# Altium PCB PCB_V1.PcbDoc (part 2 of 3)
Units mil, origin at the board's own origin, x right, y up, seen from the top; angles counter-clockwise.
Board outline 2382 x 2362.37 mil, 4 copper layers (L1, L2, L3, L4), stack 59.054 mil thick; 159 components, 117 nets, 497 pads, 313 vias.
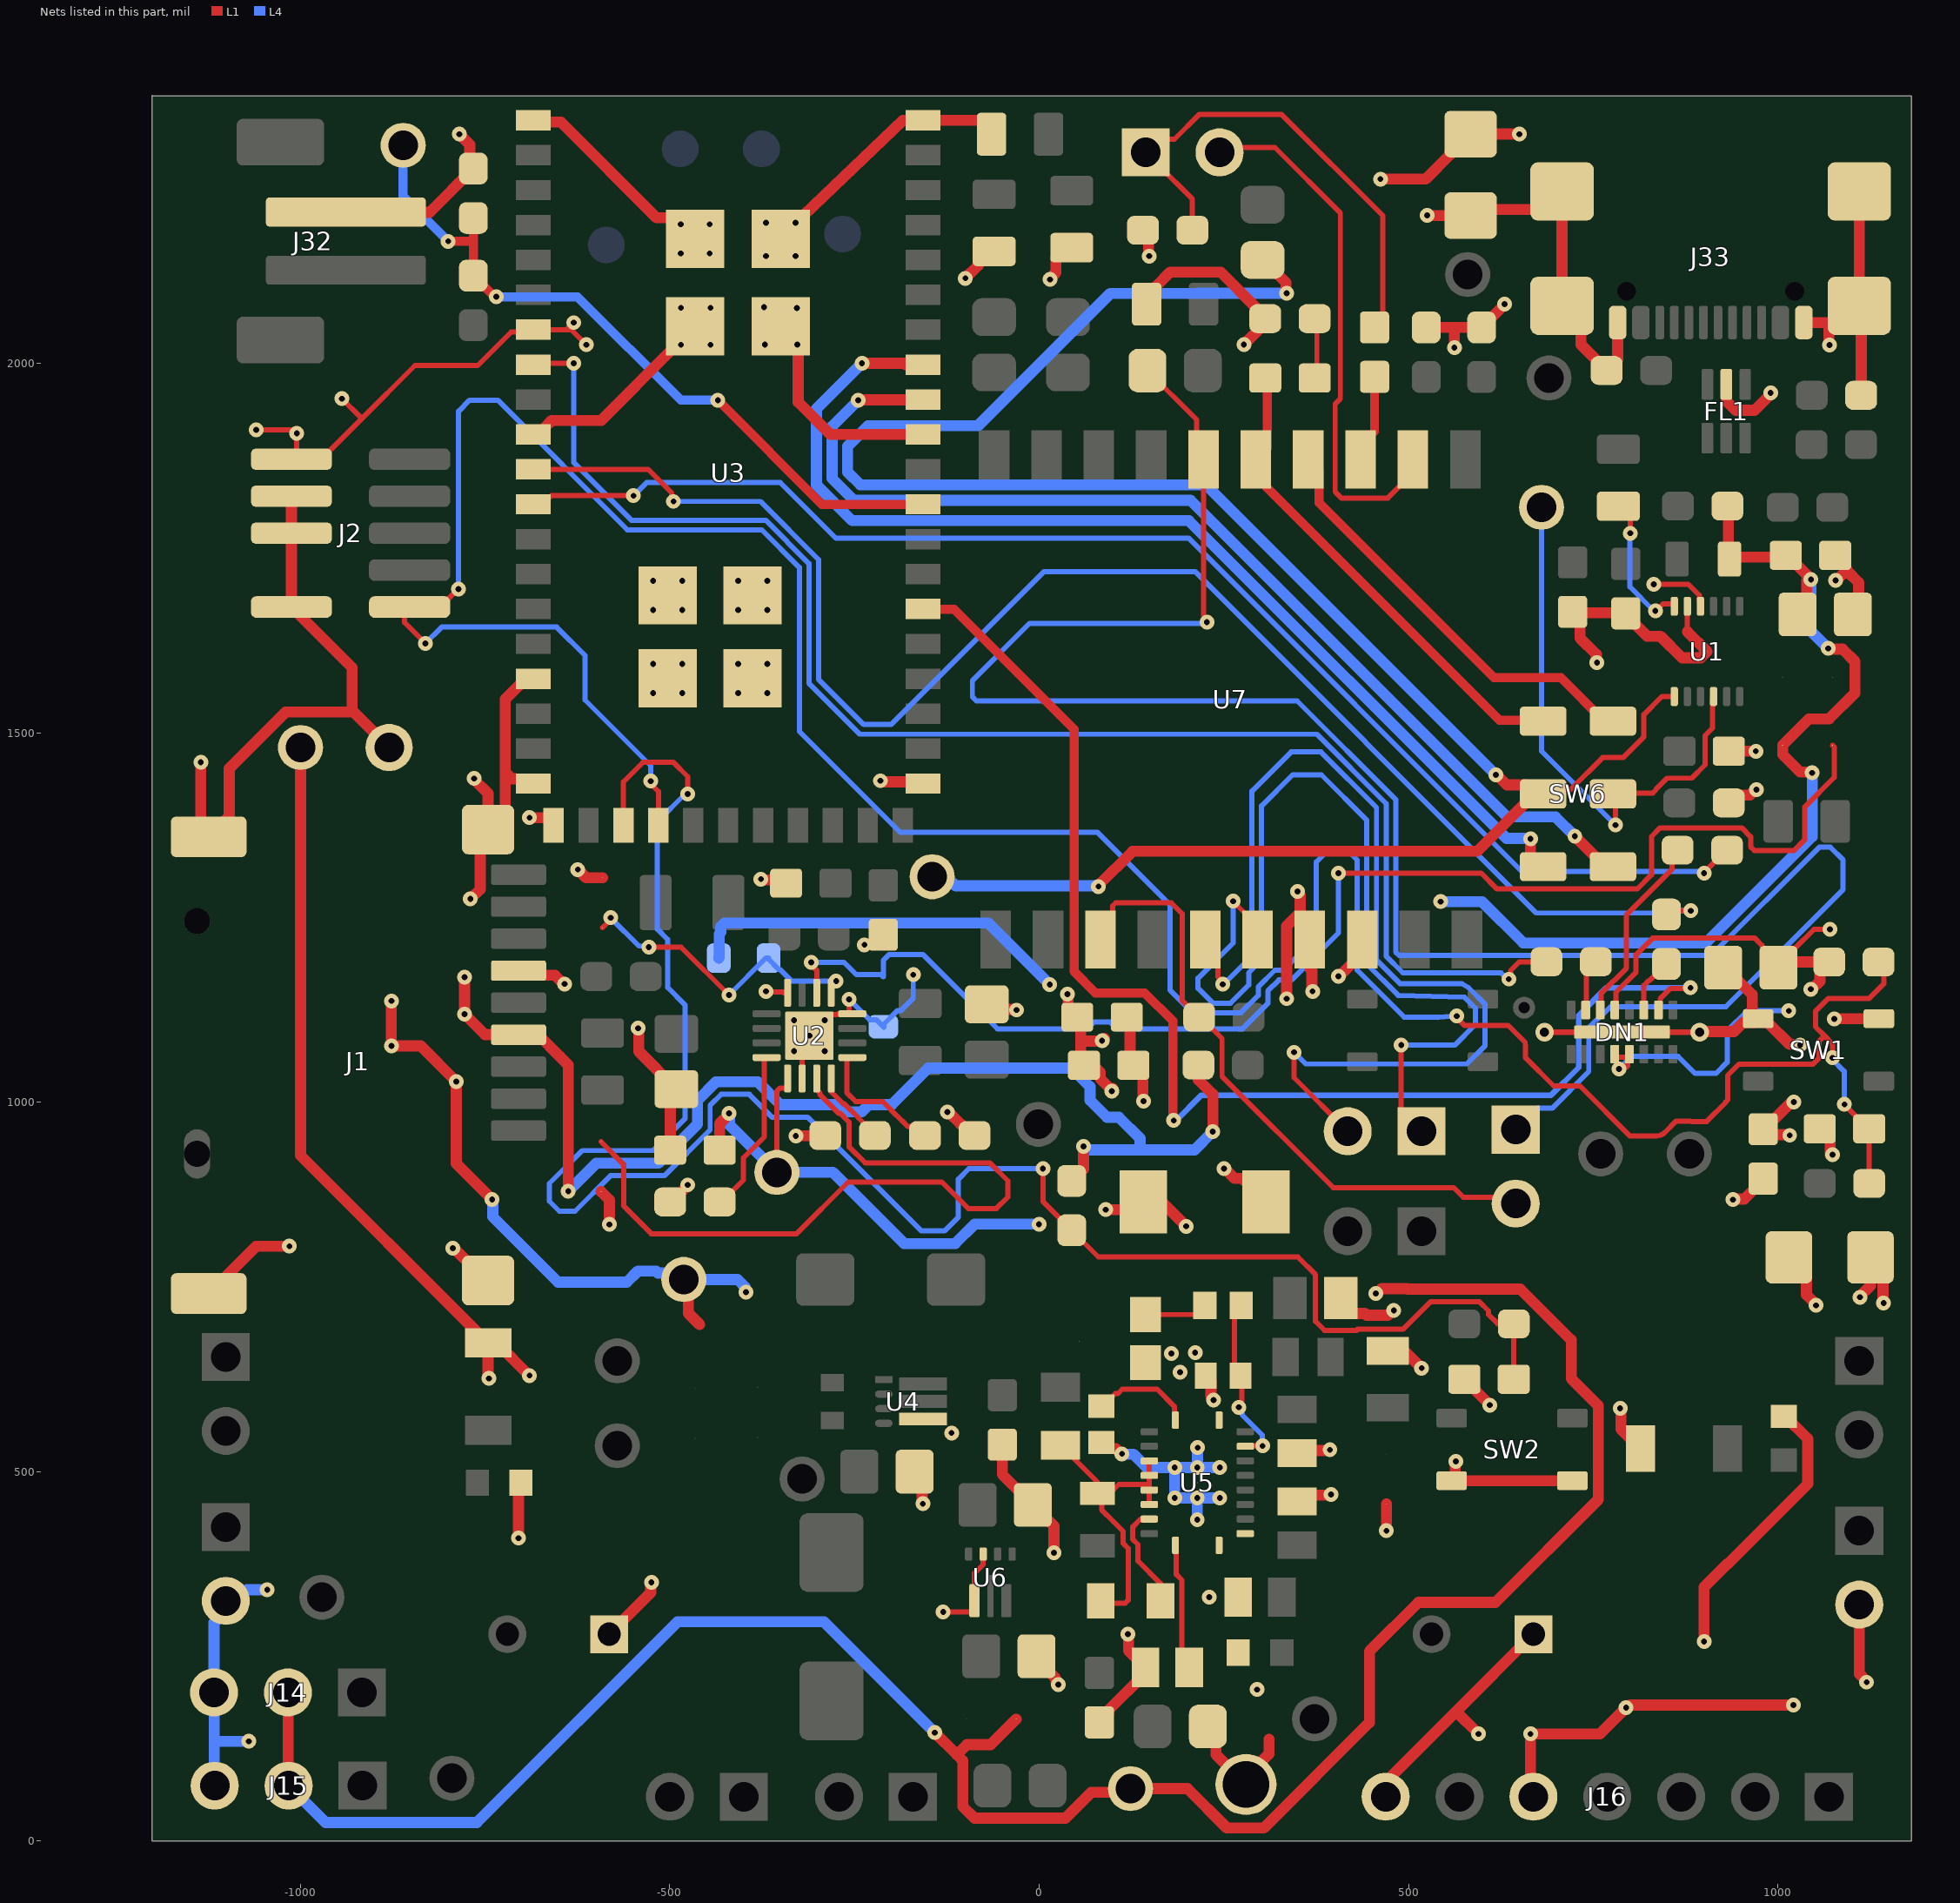
[diagram p4: the nets of this part, all layers, seen from the top]

## Part data (continued)
FL1: library part CMP-00571-2, "Terminator, 2-Line, PDSO6; RC (Pi) EMI Filter 2nd Order Low Pass 2 Channel R = 22Ohms, C = 47pF 6-TSSOP, SC-88, SOT-363, USB 1.1", Case/Package=TSSOP, Max Operating Temperature=70°C, Min Operating Temperature=-40°C, Nominal Supply Voltage=3.3V, Package Body Material=Plastic, Package Equivalence Code=TSSOP6,.08, Package Shape=Rectangular, Package Style="SMALL OUTLINE, THIN PROFILE, SHRINK PITCHMeter", Peak Reflow Temperature (Cel)=260°C, Temperature Grade=OTHER, Channels=1, Differential Output=Yes, Height - Seated (Max)=1.1mm, Interface IC Type="OTHER TERMINATOR", JESD-30 Code=R-PDSO-G6, JESD-609 Code=e3, Length=2mm, Moisture Sensitivity Level=1, Number of Signal Positions=2, Pins=6, Power Supplies=3.3V, Qualification Status="Not Qualified", Reach SVHC Compliant=Yes, RoHS Compliant=Yes, Surface Mount=Yes, Terminal Finish=Tin, Terminal Form="Gull Wing", Terminal Pitch=0.65mm, Terminal Position=DUAL, Width=1.25mm
J1: library part CMP-00419-6, "WR-CRD Micro SD Card Connector Push & Push", Contact Resistance=100mOhm, Operating Temperature="-40 to +85degC", Rated Current=0.5A, Withstanding Voltage=500VAC, Working Voltage=30VAC, ComponentLink1Description=Manufacturer, ComponentLink1URL=http://www.we-online.de, ComponentLink2Description=Datasheet, ComponentLink2URL=https://katalog.we-online.com/em/datasheet/693071020811.pdf, Design Item ID=693071020811, Gender=Socket, Memory Card Type="Micro SD", Mounting Technology=SMT, Number of Contacts=8, Packaging="Tape and Reel", Part Number=693071020811, Pin Number=8, Published Date="November 2019", Publisher="Wurth Elektronik", Source=WR-CRD.SchLib, Type="Push & Push"
J2: library part CMP-002-000013-2, "10 Pin Shrouded Header, 0.050\", Key Pin 7", Manufacturer=Samtech, Manufacturer P/N=Various, ComponentLink1Description="Pinout Reference", ComponentLink1URL=https://developer.arm.com/documentation/ka001776/1-0/?lang=en, ComponentLink2Description="Datasheet for Connector", ComponentLink2URL=http://suddendocs.samtec.com/catalog_english/ftsh_smt.pdf, Contact Finish=Gold, Description in Visual="10 Pin Shrouded Header, 0.050\", Key Pin 7", Gender=Male, Number of Contacts=10, Number of Rows=2, Orientation=Vertical, P/N="ARM Cortex Debug", Pitch="0.050\""
J4 J5 J6 J7 J8 J9 J10 J11 J12 J13: library part CMP-000021-1, "Header, 2-Pin, 0.1in Pitch, Male"
J14 J15: library part CMP-000023-1, "Header, 3-Pin, 0.1in Pitch, Male"
J16: library part CMP-00373-1, "Header, 7-Pin, 0.1in Pitch, Male", Contact Resistance=20mR, Dielectric Withstanding Voltage (AC)=500V, Insulation Color=Black, Insulation Resistance=1GR, Max Operating Temperature=125°C, Min Operating Temperature=-40°C, Rated Current (Signal)=3A, Body Breadth=0.1inch, Body Depth=0.1inch, Body Length=0.7inch, Body/Shell Style=PLUG, Connector Type="BOARD CONNECTOR", Contact Finish - Mating=GOLD, Contact Finish - Termination="Gold (Au) - with Nickel (Ni) barrier", Contact Gender=Male, Contact Material="Copper Alloy", Contact Pattern=RECTANGULAR, Contact Style="SQ PIN-SKT", Insulation Material=Polybutylene, JESD-609 Code=e4, Mating Contact Pitch=0.1inch, Mounting Option 1=LOCKING, Mounting Style=STRAIGHT, Mounting Technology=Board, Number Of Connectors=1, Number of Contacts=7, Number of Rows Loaded=1, PCB Contact Pattern=RECTANGULAR, Reach SVHC Compliant=Yes, Reference Standard=UL, Reliability=COMMERCIAL, RoHS Compliant=Yes, Terminal Length=0.118inch, Terminal Pitch=2.54mm, Termination=Solder
J32: library part CMP-00418-1, "Connector Header, PH Series, 2 Position, 2.00mm, 100V, Surface Mount, Solder, Pick and Place, Natural."
J33: library part CMP-00451-3, "USB Connector, 16 Contact(s), Male, Right Angle, Surface Mount Terminal, Locking, Receptacle USB-C (USB TYPE-C) USB 2.0 Receptacle Connector 24 (16+8 Dummy) Position Surface Mount, Right Angle"
JP1 JP2 JP4 JP5 JP9 JP10 JP11 JP12 JP13 JP14: library part CMP-00422-5, "0O link, SMD, 0603, Solder Bridge Option", Manufacturer=Generic, Manufacturer P/N=Various, Component Type="Net Tie", Description in Visual="0O link, Solder Bridge/SMD, Open", Design Item ID="0603 link", P/N="0603 link", Pin Count=2, Source="Shunts and Jumpers.SchLib"
JP3 JP6: library part CMP-00423-2, "0O link, Solder Bridge/SMD, Open", Component Type="Standard (No BOM)", Description in Visual="0O link, Solder Bridge/SMD, Open", Design Item ID="0603 link (Open)", P/N="0603 link (Open)", Pin Count=2, Source="Shunts and Jumpers.SchLib"
L1: library part CMP-002-000030-2, "General Purpose Inductor, 0.47uH, 20%, 1 Element, Powdered  Iron-Core, SMD, 2220", Current (Max)=9.2A, Current (Saturation)=21.5A, Inductor Type="GENERAL PURPOSE INDUCTOR", JESD-609 Code=e2, Manufacturer Series=744373360047, Reach SVHC Compliant=Yes, RoHS Compliant=Yes, Terminal Finish=Copper
L2: library part CMP-06042-000167-1, "FIXED IND 1UH 115MA 2.86 OHM SMD", Case Code (Imperial)=0805, Case Code (Metric)=2012, Current Rating=115mA, DC Resistance (DCR)=2.86R, Max Operating Temperature=85°C, Min Operating Temperature=-40°C, Package Quantity=3000, Resistor Type=Wirewound, Self Resonant Frequency=450MHz, Test Frequency=10MHz, Tolerance=5%, Case/Package=0805, Core Material=Ferrite, DC Current=115mA, Depth=1.4mm, Height=0.9mm, Height - Seated (Max)=0.039inch, Inductance=1uH, Lead Free="Lead Free", Length=2mm, Max DC Current=115mA, Military Standard=Not, Mount="Surface Mount", Packaging="Tape and Reel", Q Factor=35, Radiation Hardening=No, Shielding=Unshielded, Termination=SMD/SMT, Weight=0.000282oz, Width=1.5mm
L3: library part CMP-002-000018-2, "General Purpose Inductor, 1uH, 20%, 1 Element, SMD, 2827", Case/Size Code=2827, DC Resistance (DCR)=4.6mR, Inductance-Nom (L)=1uH, Inductor Application="HIGH CURRENT INDUCTOR", Inductor Type="GENERAL PURPOSE INDUCTOR", Max Current Rating=15A, Max Operating Temperature=150°C, Min Operating Temperature=-40°C, Package Height=3.8mm, Package Length=7mm, Package Style=SMTMeter, Package Width=6.9mm, Self Resonant Frequency=85MHz, Test Frequency=100kHz, Tolerance=20%, Channels=1, Construction="Magnetically Shielded", Packaging="Tape and Reel", Pins=2, Reach SVHC Compliant=Yes, RoHS Compliant=Yes, Series=744311100, Shape/Size Description="RECTANGULAR PACKAGE", Shielding=Unshielded, Surface Mount=Yes, Terminal Finish=Copper, Terminal Placement="Dual Ended", Termination=Wraparound
R1 R3 R4 R6 R7: library part CMP-005-002503-3, "Resistor Surface Mount, 1K Ohms, 0603 Footprint, 1% Tolerance 0.1W", JLCPCB Part #=C21190, Manufacturer=Various, PCB Package=0603, Power Rating=0.1W, Tolerance=1%, Description in Visual="Res SMT 1K 0603  1%  0.1W", Manufacturer P/N="RES 0603 1K 1%", Mount=SMT
R2 R5: library part CMP-005-001984-2, "Resistor Surface Mount, 1.13K Ohms, 0603 Footprint, 1% Tolerance 0.1W", Manufacturer=Various, PCB Package=0603, Power Rating=0.1W, Tolerance=1%, Description in Visual="Res SMT 1.13K 0603  1%  0.1W", Manufacturer P/N="RES 0603 1.13K 1%", Mount=SMT
R8 R9 R39: library part CMP-005-002125-2, "Resistor Surface Mount, 100 Ohms, 0603 Footprint, 1% Tolerance 0.1W", Manufacturer=Various, Manufacturer P/N="RES 0603 100R 1%", PCB Package=0603, Power Rating=0.1W, Tolerance=1%, Description in Visual="Res SMT 100 0603  1%  0.1W", Mount=SMT
R10 R11: library part CMP-005-002156-3, "Resistor Surface Mount, 10K Ohms, 0603 Footprint, 1% Tolerance 0.1W", JLCPCB Part #=C25804, Manufacturer=Various, PCB Package=0603, Power Rating=0.1W, Tolerance=1%, Description in Visual="Res SMT 10K 0603  1%  0.1W", Manufacturer P/N="RES 0603 10K 1%", Mount=SMT
R12: library part CMP-005-002260-2, "Resistor Surface Mount, 12K Ohms, 0603 Footprint, 5% Tolerance 0.1W", Manufacturer=Various, PCB Package=0603, Power Rating=0.1W, Tolerance=5%, Description in Visual="Res SMT 12K 0603  5%  0.1W", Manufacturer P/N="RES 0603 12K 5%", Mount=SMT
R13 R15: library part CMP-005-003296-4, "Resistor Surface Mount, 5.1K Ohms, 0603 Footprint, 1% Tolerance 0.1W", Manufacturer=Various, PCB Package=0603, Power Rating=0.1W, Tolerance=1%, Description in Visual="Res SMT 5.1K 0603  1%  0.1W", Manufacturer P/N="RES 0603 5.1K 1%", Mount=SMT
R14 R34: library part CMP-005-002155-2, "Resistor Surface Mount, 10K Ohms, 0603 Footprint, 0.1% Tolerance 0.1W", Manufacturer=Various, PCB Package=0603, Power Rating=0.1W, Tolerance=0.1%, Description in Visual="Res SMT 10K 0603  0.1%  0.1W", Manufacturer P/N="RES 0603 10K 0.1%", Mount=SMT
R16 R17 R19 R20 R24 R35: library part CMP-005-001964-4, "Resistor Surface Mount, 0 Ohms, 0603 Footprint, 5% Tolerance 0.1W", JLCPCB Part #=C21189, Manufacturer=Various, Manufacturer P/N="RES 0603 0R 5%", PCB Package=0603, Power Rating=0.1W, Tolerance=5%, Description in Visual="Res SMT 0 0603  5%  0.1W", Mount=SMT
R21 R23: library part CMP-005-003137-2, "Resistor Surface Mount, 4.7K Ohms, 0603 Footprint, 1% Tolerance 0.1W", Manufacturer=Various, PCB Package=0603, Power Rating=0.1W, Tolerance=1%, Description in Visual="Res SMT 4.7K 0603  1%  0.1W", Manufacturer P/N="RES 0603 4.7K 1%", Mount=SMT
R22 R36 R37 R38: library part CMP-005-005144-2, "Resistor Surface Mount, 470 Ohms, 0805 Footprint, 5% Tolerance 0.125W", Manufacturer=Various, Manufacturer P/N="RES 0805 470R 5%", PCB Package=0805, Power Rating=0.125W, Tolerance=5%, Description in Visual="Res SMT 470 0805  5%  0.125W", Mount=SMT
R25: library part CMP-03211-008573-2, "Surface Mount Resistors, Precision Resistor, 2 Terminations, Size Code 0805, Cut Tape Length, .1%, Thin Film, 10K 0.1% 10PPM", Case Code (Imperial)=0805, Case Code (Metric)=2012, Max Operating Temperature=155°C, Min Operating Temperature=-55°C, Number of Resistors=1, Package Quantity=1000, Power Rating=125mW, Resistance=267kR, Temperature Coefficient=15ppm/°C, Tolerance=0.1%, Voltage Rating=150V, Case/Package=0805, ELV=Compliant, Height=0.55mm, Length=2mm, Mount="Surface Mount", Number of Terminations=2, Packaging="Tape and Reel", Termination=Solder, Weight=0.000194oz, Width=1.25mm
R26: library part CMP-2001-04290-2, "RES Thick Film, 127kΩ, 1%, 0.125W, 100ppm/°C, 0805", Case Code (Imperial)=0805, Case Code (Metric)=2012, Max Operating Temperature=155°C, Max Power Dissipation=125mW, Min Operating Temperature=-55°C, Package Quantity=10, Resistance=127kR, Temperature Coefficient=100ppm/°C, Tolerance=1%, Voltage Rating=150V, Case/Package=0805, Composition="Thick Film", Contact Plating=Tin, Depth=1.25mm, Features="Automotive AEC-Q200", Height=0.02inch, Lead Free="Lead Free", Length=2mm, Military Standard=Not, Number of Pins=2, Number of Terminations=2, Packaging="Tape and Reel", Power Rating=125mW, Radiation Hardening=No, Voltage Rating (DC)=150V, Weight=0.000194oz, Width=1.25mm
R27: library part CMP-03211-004111-1, "CRGCQ0805 470KΩ 0.125W ±100ppm/°C 5% 150V", Ambient Temperature Range High=+70°C, Manufacturer="TE Connectivity", Manufacturer Part Number=CRGCQ0805J470K, Package=CRGCQ0805, Power Rating=0.125W, Resistance=470KΩ, Temperature="-55°C to +155°C", Temperature Coefficient=±100ppm/°C, Temperature Range High=+155°C, Temperature Range Low=-55°C, Tolerance=0.05, Voltage Rating=150V, Automotive=Yes, Automotive Grade="Grade 1294", Category=Res, ComponentLink2Description=Datasheet, ComponentLink2URL=https://www.te.com/commerce/DocumentDelivery/DDEController?Action=showdoc&DocId=Data+Sheet%7F1773204-3%7F1%7Fpdf%7FEnglish%7FENG_DS_1773204-3_1.pdf%7F4-2176341-1303, Composition="Thick Film", Device Class L1="Passive Components", Device Class L2=Resistors, Device Class L3="Chip SMD Resistors", Height=0.65mm, Ipc Land Pattern Name=RESC200125X55, Lead Free=Yes, Octopart=https://octopart.com/crgcq0805j470k-te+connectivity-91018228, RoHS=TRUE, Series=CRGCQ
R28: library part CMP-2000-03154-1, Manufacturer="Vishay Dale", Part Number=CRCW060328K7FKEA
R29: library part CMP-2001-04400-1, Manufacturer=Panasonic, Part Number=ERJ-6ENF1183V
R30: library part CMP-005-004027-2, "Resistor Surface Mount, 100K Ohms, 0805 Footprint, 1% Tolerance 0.125W", Manufacturer=Various, PCB Package=0805, Power Rating=0.125W, Tolerance=1%, Description in Visual="Res SMT 100K 0805  1%  0.125W", Manufacturer P/N="RES 0805 100K 1%", Mount=SMT
R31: library part CMP-005-005525-2, "Resistor Surface Mount, 732K Ohms, 0805 Footprint, 1% Tolerance 0.125W", Manufacturer=Various, PCB Package=0805, Power Rating=0.125W, Tolerance=1%, Description in Visual="Res SMT 732K 0805  1%  0.125W", Manufacturer P/N="RES 0805 732K 1%", Mount=SMT
R33: library part CMP-005-002832-2, "Resistor Surface Mount, 2K Ohms, 0603 Footprint, 0.1% Tolerance 0.1W", Manufacturer=Various, PCB Package=0603, Power Rating=0.1W, Tolerance=0.1%, Description in Visual="Res SMT 2K 0603  0.1%  0.1W", Manufacturer P/N="RES 0603 2K 0.1%", Mount=SMT
R40: library part CMP-1659-00056-1, "Chip Resistor, 1 MOhm, +/- 1%, 100 mW, -55 to 155 degC, 0603 (1608 Metric), RoHS, Tape and Reel", Capacitance="1 mF", Case\Package=Radial, Max Operating Temperature="85 degC", Min Operating Temperature="-40 degC", Package Quantity=200, Tolerance=20%, Voltage Rating="25 V", ComponentLink1Description="Manufacturer URL", ComponentLink1URL=http://www.yageo.com/, ComponentLink2Description=Datasheet, ComponentLink2URL=http://www.yageo.com/documents/recent/PYu-RC_Group_51_RoHS_L_04.pdf, DatasheetVersion="Rev. 4, 02/2016", Diameter="10 mm", Height="20 mm", Lead Pitch="5 mm", Length="20 mm", Mount="Through Hole", PackageDescription="2-Pin Surface Mount Device, Body 1.6 x 0.8 mm", PackageReference=0603, Packaging=Bulk, Radiation Hardening=No, REACH SVHC="No SVHC", RoHSCompliant=true, Voltage Rating (DC)="25 V", Width="0 inch"
SW1 SW2 SW7: library part CMP-00084-6, "Keypad Switch, 1 Switches, SPST, Momentary tactile button, 0.05A, 16VDC, 3.23N, Solder Terminal, Surface Mount-straight", Actuator Color=White, Contact Resistance=0.5mR, Dielectric Withstand Volts=250VACV, Insulation Resistance=100MR, Manufacturer Series=PTS810, Max Operating Temperature=85°C, Min Operating Temperature=-40°C, Actuator Length=0.028inch, Actuator Travel=0.1524mm, Actuator Type=Pushbutton, Circuit=SPST, Electrical Life=50000Cycles, JESD-609 Code=e4, Mounting Technology="Surface Mount", Reach SVHC Compliant=Yes, RoHS Compliant=Yes, Solderability=REFLOW, Switch Action=MOMENTARY, Switch Function=OFF-MOM, Switch Type=Keypad, Terminal Finish=Silver, Termination=Solder, Type=Tactile
SW6: library part CMP-00536-1, "Slide Switch, 2 Positions, DPDT, Latched, 0.3A, 6VDC, Solder Terminal, Surface Mount-straight", Circuit=DPDT, Switch Function=ON-ON, Type=Slide
TP1 TP2 TP3 TP4 TP5 TP6 TP7 TP9 TP10 TP11 TP12 TP13 TP14 TP15 TP16 TP17 TP18 TP19 TP20 TP21 TP22 TP23 TP24 TP25: library part CMP-00049-8, "Test Pad/Point (Testpoint, Testpad), for probing"
  TP1: NetName=SD_CD
  TP2: NetName=WI_TX
  TP3: NetName=WI_RX
  TP4: NetName=WI_RST
  TP5: NetName=WI_EN
  TP6: NetName=CLI_RX
  TP7: NetName=CLI_TX
  TP9: NetName=GND
  TP10: NetName=VUSB
  TP11: NetName=VBAT
  TP12: NetName=VSYS
  TP13: NetName=BOOST_VIN
  TP14: NetName=BOOST_6V
  TP15: NetName=BUCK_VIN
  TP16: NetName=3V3
  TP17: NetName=6V
  TP18: NetName=5V
  TP19: NetName=ADC_VIN
  TP20: NetName=PWM_M1
  TP21: NetName=PWM_M2
  TP22: NetName=FB_M2
  TP23: NetName=FB_M1
  TP24: NetName=SCL_AI
  TP25: NetName=SDA_AI
TP8: library part CMP-024-000010-2, "Circuit Board Hardware - PCB TEST POINT BLACK MULTIPURPOSE 5011 5281"
U1: library part CMP-00104-3, "USB Bridge, USB to UART USB 2.0 UART Interface 12-DFN (3x3)", Case/Package=HTSON, Max Operating Temperature=85°C, Max Supply Voltage=5.5V, Min Operating Temperature=-40°C, Min Supply Voltage=2.97V, Nominal Supply Voltage=5V, Package Body Material=Plastic, Package Shape=Square, Package Style="SMALL OUTLINE, HEAT SINK/SLUG, THIN PROFILEMeter", Peak Reflow Temperature (Cel)=260°C, Power Supplies=1.8/3.3,3.3/5V, Temperature Grade=INDUSTRIAL, Time @ Peak Reflow Temperature-Max (s)=40s, Length=3mm, Moisture Sensitivity Level=3, Pins=12, Qualification Status="Not Qualified", Reach SVHC Compliant=Yes, RoHS Compliant=Yes, Surface Mount=Yes, Technology=CMOS, Terminal Form="No Lead", Terminal Pitch=0.45mm, Terminal Position=DUAL, Width=3mm
U2: library part CMP-00080-5, "Power Supply Support Circuit, Adjustable, 1 Channel, 6.6, PQCC16", Case/Package=HVQCCN, Max Operating Temperature=85°C, Max Supply Voltage=26V, Min Operating Temperature=-40°C, Min Supply Voltage=4.35V, Nominal Supply Voltage=5V, Package Body Material=Plastic, Package Equivalence Code=LCC16,.12SQ,20, Package Shape=Square, Package Style="CHIP CARRIER, HEAT SINK/SLUG, VERY THIN PROFILEMeter", Peak Reflow Temperature (Cel)=260°C, Power Supplies=4.5/6.3V, Supply Current-Max (Isup)=1.5mA, Temperature Grade=INDUSTRIAL, Adjustable Threshold=Yes, Channels=1, Height - Seated (Max)=1mm, JESD-30 Code=S-PQCC-N16, JESD-609 Code=e4, Length=3mm, Moisture Sensitivity Level=2, Number Of Channels=1, Pins=16, Qualification Status="Not Qualified", Reach SVHC Compliant=Yes, RoHS Compliant=Yes, Surface Mount=Yes, Terminal Finish=Nickel, Terminal Form="No Lead", Terminal Pitch=0.5mm, Terminal Position=QUAD, Throw Configuration="POWER SUPPLY SUPPORT CIRCUIT", Width=3mm
U3: library part CMP-00071-11, "WiFi 802.11b/g/n Transceiver Module 2.412GHz ~ 2.484GHz Integrated, Trace Surface Mount, Integrated SAMD21 Cortex M0+", FCC ID=2ADHKSAMW25, MCU Chipset=ATSAMD21G18A
U4: library part CMP-04918-000186-1, "IC REG BUCK 3.3V 3A 7VSON-HR", Case/Package=VQFN, Max Input Voltage=6V, Max Operating Temperature=125°C, Max Output Current=3A, Min Input Voltage=2.5V, Min Operating Temperature=-40°C, Min Output Voltage=3.3V, Package Quantity=3000, Switching Frequency=2.4MHz, Efficiency=95%, Lead Free="Lead Free", Mount="Surface Mount", Number of Outputs=1, Number of Pins=7, Operating Supply Voltage=6V, Output Configuration=Positive, Output Current=3A, Output Type=Fixed, Output Voltage=3.3V, Packaging="Tape and Reel", Radiation Hardening=No, RoHS Compliant=Yes, Synchronous Rectifier=Yes
U5: library part CMP-00676-1, "Switching Regulator, Current-mode, 13A, 2200kHz Switching Freq-Max, PQCC20", Case/Package=HVQCCN, Frequency=2.2MHz, Max Operating Temperature=85°C, Max Output Current=13A, Max Supply Voltage=12V, Min Input Voltage=2.7V, Min Operating Temperature=-40°C, Nominal Output Voltage=9V, Nominal Supply Voltage=3.6V, Package Body Material=Plastic, Package Shape=Rectangular, Package Style="CHIP CARRIER, HEAT SINK/SLUG, VERY THIN PROFILEMeter", Temperature Grade=INDUSTRIAL, Channels=1, Control Mode=CURRENT-MODE, Control Technique="PULSE WIDTH MODULATION", Height - Seated (Max)=1mm, JESD-609 Code=e4, Length=4.5mm, Moisture Sensitivity Level=2, Pins=20, Reach SVHC Compliant=Yes, RoHS Compliant=Yes, Surface Mount=Yes, Switcher Configuration=BOOST, Terminal Finish=Nickel, Terminal Form="No Lead", Terminal Pitch=0.5mm, Terminal Position=QUAD, Throw Configuration="SWITCHING REGULATOR", Width=3.5mm
U6: library part CMP-04918-000029-1, "POWER MANAGEMENT", Manufacturer="Texas Instruments", Max Junction Temp=+125°C, Max Supply Voltage=5.5V, Min Supply Voltage=0.5V, Nominal Supply Current=27uA, Output Current=8A, Output Voltage=2.2-5.5V, Package=RWU0007A, Switching Frequency=600-1000kHz, Temperature="-40°C to +125°C", Temperature Range Low=-40°C, Automotive=No, Category=IC, ComponentLink2Description=Datasheet, ComponentLink2URL=http://www.ti.com/lit/ds/symlink/tps61022.pdf, Device Class L1="Integrated Circuits (ICs)", Device Class L2="Power Management ICs", Device Class L3="Voltage Regulators - Switching", Digikey Description="POWER MANAGEMENT", Height=1mm, Lead Free=Yes, Manufacturer Part Number=TPS61022RWUR, Max Duty Cycle=97%, Mouser Description="8-A boost converter with 0.5-V ultra-low input voltage 7-VQFN-HR -40 to 125", Number of Outputs=1, Octopart=https://octopart.com/tps61022rwur-texas+instruments-100045592, Output Type=AdjustableProgrammable, RoHS=TRUE, Standoff Height=0mm, Switching Topology=Boost, Temperature Range High=+125°C
U7: library part CMP-00713-2, "AI Audio Module"
Y1: library part CMP-078-000002-2, "Parallel - Fundamental Quartz Crystal, 0.032768MHz Nom", Frequency=32.768kHz, Frequency Tolerance=20ppm, Load Capacitance=12.5pF, Max Operating Temperature=85°C, Min Operating Temperature=-40°C, Operating Frequency-Nom=0.032768, Additional Feature="TAPE AND REEL", Aging="3 PPM/FIRST YEAR", Crystal/Resonator Type="PARALLEL - FUNDAMENTAL", Drive Level=0.5uW, ESR=70kR, Mounting Technology="Surface Mount", Reach SVHC Compliant=Yes, RoHS Compliant=Yes

## Via types
v1: diameter 20, hole 8, L1 to L4, tented both sides, 296 vias
v2: diameter 20, hole 8, L1 to L4, 12 vias
v3: diameter 25, hole 12.5, L1 to L4, tented both sides, 2 vias
v4: diameter 20, hole 8, L1 to L4, tented top, 2 vias
v5: diameter 27.56, hole 11.81, L1 to L4, tented both sides, 1 vias

## Nets (pads, with @x,y where several pads share a name; then routed paths per layer and width w, separated by ;. In a path a pad name is that pad's centre, name@x,y a point inside that pad or via, vN(x,y) a via of type N, cw(c..) or ccw(c..) an arc to the next point about the centre after c; other vN are vias at no path point)
3V3: C1.2 C10.2 C13.2 C34.2 DN1.4 DN1.5 DN1.13 J1.4 J2.1 J16.5 JP11.2 R7.1 R10.2 R11.2 R21.2 R23.2 R39.2 TP16.1 U3.7 U3.21 | length 5061.3
  L1 w7: v1(-1060,1910) -1013.52,1910 -1008.52,1905 v1(-1005,1905) J2.1@-1005,1877.69 ; J2.1@-1003.53,1878.82 -963.18,1878.82 -918.5,1923.5 ; v1(-944,1952) -918.5,1926.5 -918.5,1923.5 ; v1(-630,2055) -630.97,2055 -640.6,2045.37 ; v1(-613,2025) -633.37,2045.37 -640.6,2045.37 ; DN1.4@779.09,1064.86 779.09,1062.73 780.78,1061.05 798.78,1061.05 DN1.5@798.78,1064.86 ; DN1.13@779.09,1124.7 780.49,1126.1 780.49,1148.5 807.87,1175.88 807.87,1199.54 830.32,1221.99 968.57,1221.99 978.55,1212.01 978.55,1209.56 998.42,1189.7 1000.64,1189.7 C1.2@1000.64,1181.96 C1.2@1008.31,1189.63 ; v1(784.76,1045.04) 786.77,1047.05 794.46,1047.05 796.37,1048.96 796.37,1055.96 DN1.5@798.78,1058.36 ; C1.2@1014,1207.25 1014.26,1206.99 1021.73,1206.99 1048.52,1233.78 v1(1070.22,1233.78) ; -918.5,1923.5 -845,1997 -760,1997 -714.72,2042.28 -687.79,2042.28 U3.7@-684.7,2045.37 -640.6,2045.37
  L1 w15: v1(-877,1137) v1(-877,1076) -837,1076 v1(-789,1028) -789,916.8 v1(-740.54,868.34) ; v1(-778,1169) v1(-778,1119) -750.34,1091.34 J1.4@-704.88,1091.34 -678.52,1091.34 -648.73,1061.55 ; v1(-690,1385) -663.57,1385 -657.29,1378.72 U3.21@-657.29,1374.45 ; -649,1062 -648.73,1061.73 -648.73,1061.55 ; v1(-637.54,879.41) -637.54,1050.36 -648.73,1061.55 ; TP16.1@-481.07,760 -475.04,753.98 -475.04,714.29 JP11.2@-459.75,699 ; R11.2@43.93,893.47 60,909.54 v1(60,940) ; R39.2@215.47,1050 215.47,1030.31 235,1010.78 v1(235,960) ; v1(461.9,2249.2) 523.01,2249.2 556.23,2282.42 556.23,2286.16 580.2,2310.12 C13.2@583.93,2310.12 649.88,2310.12 v1(650,2310) ; R23.2@523.93,2048.47 R21.2@598.93,2048.47 630,2079.54 v1(630,2080) ; v1(562,2021) 562,2047 ; J16.5@668.93,60 665,63.94 v1(665,145) 758.89,145 v1(794.43,180.54) ; v1@794.14,180.83 796.07,180.83 799.39,184.14 v1(1020.86,184.14) ; R7.1@933.46,1405 944.08,1415.61 962.09,1415.61 969.48,1423 v1(970.83,1423) ; C34.2@980,963.46 988.27,971.73 989.9,971.73 1017.38,999.21 1020.54,999.21 v1(1021.5,1000.17) ; C34.2@996,956.07 1013.57,956.07 v1@1014.53,955.12 ; C1.2@1008.31,1189.63 R10.2@1069.27,1189.63 ; v1(1044.46,1152.91) 1045.41,1153.87 1046.94,1153.87 1056.66,1163.59 R10.2@1056.66,1177.8 ; v1(1111,736) 1111,737.35 1125.12,751.47 C10.2@1125.12,790 ; C10.2@1142.12,773 1142.12,728.88 v1(1143,728)
  L4 w7: v1(784.76,1045.04) 801.55,1061.83 864.79,1061.83 887.62,1039 916.3,1039 931.24,1053.94 931.24,1096.24 958.59,1123.59 v1(1014.58,1123.59)
  L4 w15: v1(-740.54,868.34) -739.59,867.38 -739.59,844.9 -651.18,756.5 -558.22,756.5 -543.22,771.5 -518.78,771.5 -516.09,768.81 -489.88,768.81 TP16.1@-481.07,760 -408.29,760 -397.96,749.67 -397.96,743.96 v1(-397,743) ; v1(-637.54,879.41) -599.46,917.5 -515.47,917.5 -462.5,970.47 -462.5,1002.6 -437.6,1027.5 -380.99,1027.5 -350.24,996.75 -274.47,996.75 -264.67,986.95 -240.23,986.95 -230.42,996.75 -199.54,996.75 -150.29,1046 43.65,1046 68.73,1020.92 68.73,1002.58 91.74,979.57 107.81,979.57 136.38,951 136.38,935.34 ; v1(60,940) 61.35,940 66.01,935.34 136.38,935.34 ; v1(235,960) 210.34,935.34 136.38,935.34
  other v1: 1015.88,955.12
5V: C3.2 C5.2 C8.2 C29.2 C32.2 D13.2 FB1.2 J14.2 J15.2 JP4.2 JP6.1 JP12.2 R1.2 R33.1 TP10.1 TP18.1 U1.4 U2.13 U7.17 | length 6284
  L1 w7: TP10.1@-355,905 -355,1015.02 -350.9,1019.12 -341.81,1019.12 -340.6,1020.33 U2.13@-340.6,1032.01 ; v1(832,1701) 832.12,1700.88 878.63,1700.88 893.65,1685.86 893.65,1678.13 U1.4@895,1676.78
  L1 w15: J14.2@-1017.03,201.11 -1016.55,200.63 -1016.55,75.49 J15.2@-1016.07,75 ; C8.2@-432.6,935 -432.6,971.04 -420,983.65 v1(-420,985) ; v1(-141.43,146.73) -111.49,116.79 ; JP12.2@-31.25,165 -65.75,130.5 -97.77,130.5 -111.49,116.79 ; v1(38.2,1146.2) 39.15,1145.24 39.15,1127.19 51.34,1115 C32.2@51.54,1115 56,1110.53 56,1082.5 ; v1@88.25,1086.25 v1(85.07,1083.07) 84.5,1082.5 56,1082.5 ; v1(90,854.5) 130.36,854.5 D13.2@140.86,865 166,865 v1(199,832) ; v1@99.72,1018.72 99.72,1016.29 v1(98.23,1014.8) 98.23,1016.16 82.53,1031.86 82.53,1040.47 73,1050 C29.2@60.47,1050 56,1054.47 56,1082.5 ; R33.1@140.47,2180 148.04,2172.43 148.04,2145.96 v1(149,2145) ; v1(335,1140) 335,1238.41 353.16,1256.58 353.16,1279.98 349.5,1283.65 v1(349.5,1285) ; U7.17@366.33,1220 366.33,1180.63 369.04,1177.92 369.04,1150.96 v1(370,1150) ; v1(455.52,741.17) 456.87,741.17 463.29,747.59 497.89,747.59 498.48,747 651.19,747 720.19,678 720.19,625.92 756.86,589.25 756.86,462.28 617.67,323.09 513.25,323.09 447,256.84 447,160.55 304.15,17.7 254.02,17.7 200.66,71.06 TP18.1@123.58,71.06 118.62,66.11 70.56,66.11 35.43,30.98 -87.57,30.98 -103.56,46.97 -103.56,108.86 -111.49,116.79 ; R1.2@931.61,1806.63 932.99,1805.25 932.99,1736.38 FB1.2@934.37,1735 ; FB1.2@939.37,1740 941.87,1737.5 1008.04,1737.5 C5.2@1010.54,1740 1012.5,1740 1044.71,1707.79 v1(1044.71,1707.47) ; C3.2@1026.53,1660 1038.92,1672.39 v1@1038.92,1705.85 ; v1(1046.35,1445.66) 1045.4,1446.62 1030.42,1446.62 1006.34,1470.7 JP4.2@1006.34,1483.12 1041.93,1518.72 1069.29,1518.72 1104.25,1553.68 1104.25,1596.32 1087.53,1613.04 1068.96,1613.04 v1(1068,1614)
  L4 w15: J15.2@-1016.07,75 -966.07,25 -761.24,25 -489.35,296.9 -291.6,296.9 v1(-141.43,146.73) ; JP6.1@-433.75,1195 -433.31,1195.44 -433.31,1227.69 -431,1230 -431,1237.5 -426,1242.5 -68.96,1242.5 v1(14.27,1159.27) ; v1(-420,985) -419.04,984.04 -419.04,969.04 TP10.1@-355,905 -279.34,905 -182.96,808.62 -113.64,808.62 -87.25,835 -0.59,835 v1(-0.3,834.7) ; v1(543.5,1271.33) 599.31,1271.33 655.14,1215.5 902.46,1215.5 1046.35,1359.4 v1(1046.35,1445.66) ; v1(1044.71,1707.47) 1044.71,1637.29 v1(1068,1614)
6V: F1.1 F2.2 JP10.2 TP17.1 | length 1136
  L1 w15: TP17.1@-1000,1480 -1000,927.94 -765.81,693.75 -765.75,693.75 F1.1@-746.07,674.06 ; v1(-745,626) -745,627.35 -746.07,628.42 F1.1@-746.07,674.06 ; v1(-690,630) -734.06,674.06 F1.1@-746.07,674.06 ; v1(470,420) JP10.2@470,456.25 ; v1(786.36,585.73) 787.32,584.77 787.32,557.72 F2.2@813.73,531.31
ADC_VIN_1: R12.2 R14.1 TP19.1 U3.40 | length 1001.8
  L1 w12.33: v1(-800,2165) -768.6,2165 ; R14.1@-766.07,2196.54 -766.07,2165 R12.2@-766.07,2118.47 -748.49,2100.89 -747.97,2100.89 -737.08,2090 v1(-735,2090) ; v1(-435,1950) -294.15,1809.15 U3.40@-157.14,1809.15
  L4 w12.33: TP19.1@-861.07,2295 -861.07,2226.07 v1(-800,2165) ; v1(-735,2090) -625.17,2090 -485.17,1950 v1(-435,1950)
AI_RX_1: C30.2 SW6.6 U7.5 | length 667
  L1 w12.33: C30.2@305.91,1980 308.93,1976.98 308.93,1885.67 U7.5@293.26,1870 307.77,1855.5 307.77,1832.23 623.34,1516.66 680.32,1516.66 680.97,1516.66 SW6.6@682.07,1515.56
AI_TX_1: SW6.3 U7.4 | length 585.1
  L1 w12.33: U7.4@364.13,1870 378.63,1855.5 378.63,1811.37 615.69,1574.31 706,1574.31 764.75,1515.56 SW6.3@776.56,1515.56
BATT_VOL_DETECT_5: C12.2 R9.2 R11.1 U3.23 | length 2703.5
  L1 w7: U3.23@-562.8,1374.45 -562.8,1433.57 -536.44,1459.92 -495.09,1459.92 -475.8,1440.64 v1@-475.8,1417.55 ; v1(5,910) 5,865.47 79.98,790.49 350.03,790.49 373.93,766.59 373.93,703.42 386.07,691.29 429.74,691.29 431.04,692.59 492.59,692.59 530,730 595.6,730 608.15,717.46 608.15,712.55 620.7,700 R9.2@642.4,700 C12.2@642.4,625
  L4 w7: v1(-475.8,1417.07) -479.32,1417.07 -516.94,1379.45 -516.94,1234.17 -503,1220.22 -503,1155.25 -479.5,1131.75 -479.5,977.51 -522.51,934.5 -618.52,934.5 -663.04,889.98 -663.04,865.94 -649.56,852.46 -628.44,852.46 -580.4,900.5 -507.5,900.5 -445.5,962.5 -445.5,995.56 -430.56,1010.5 -392.5,1010.5 -361.75,979.75 -313.69,979.75 -159.55,825.62 -128.32,825.62 -109.5,844.44 -109.5,895.69 -95.19,910 v1(5,910)
BQ_BAT_TS_4: R6.2 U2.1 | length 184.5
  L1 w7: U2.1@-253.07,1060.48 -259.37,1060.48 -260.58,1059.27 -260.58,1012.96 -248.38,1000.75 -211.65,1000.75 -200.5,989.61 -200.5,989.44 -185.56,974.5 -185.39,974.5 -178.04,967.15 -166.67,967.15 R6.2@-154.53,955
BQ_EN_1_4: JP3.2 JP4.1 U2.6 | length 1862.8
  L1 w7: v1(-308.55,1189.21) -308.55,1185.7 -301.23,1178.37 U2.6@-301.23,1148 ; v1(405,1310) 598.15,1310 619.62,1288.53 809.52,1288.53 828.69,1307.7 828.69,1359.38 840.56,1371.24 950.93,1371.24 963.07,1359.1 963.07,1345.53 968.04,1340.57 1021.67,1340.57 1036,1354.9 1036,1399.24 1076.31,1439.56 1076.31,1480.65 JP4.1@1073.84,1483.12
  L4 w7: v1(-308.55,1189.21) -264.24,1189.21 -247.63,1172.6 -214.07,1172.6 JP3.2@-211.07,1169.6 -211,1169.67 -211,1172.6 -211,1192 -203,1200 -157.51,1200 -131.58,1174.06 -56.71,1099.2 65.13,1099.2 74.51,1108.57 95.63,1108.57 105.01,1099.2 275.2,1099.2 309.5,1133.5 309.5,1150.56 324.44,1165.5 341.5,1165.5 405,1229 v1(405,1310)
BQ_EN_2_4: JP5.1 JP6.2 U2.5 | length 421.2
  L1 w7: JP5.1@-591.07,1236.25 -580.22,1247.11 v4(-580.22,1249.6) ; v1(-528.5,1209.66) -484.66,1209.66 v1(-420,1145) ; U2.5@-281.54,1148 -281.54,1159.54 -277.37,1163.71 v1(-274.8,1163.71)
  L4 w7: v4(-580.22,1249.6) -541.88,1211.27 -530.11,1211.27 v1(-528.5,1209.66) ; v1(-420,1145) -370,1195 JP6.2@-366.25,1195 -366.25,1193.44 -351.73,1178.92 -350.17,1178.92 -334.96,1163.71 v1(-274.8,1163.71)
BQ_ILIM_4: R2.2 U2.12 | length 230.8
  L1 w7: R2.2@-432.6,865 -428.59,860.99 -428.59,866.52 -400.45,894.65 -400.45,924.55 -372,953 -372,1059.27 -370.79,1060.48 U2.12@-369.06,1060.48
BQ_ISET_4: R5.1 U2.16 | length 102.4
  L1 w7: U2.16@-281.54,1032.01 -281.54,1013.94 -265.6,998 -264.01,998 -244.53,978.53 -244.53,978.32 -222.6,956.39 R5.1@-222.6,955
BQ_SYSOFF_4: JP2.2 U2.15 | length 1053.2
  L1 w7: JP2.2@-593.09,946.36 -562.59,915.86 -562.59,859.54 -525.06,822 -328.43,822 -258.56,891.87 -131.87,891.87 -96,856 -58,856 -42.5,871.5 -42.5,893.56 -66.8,917.87 -235.6,917.87 -257.53,939.79 -257.53,973.14 -269.4,985 -271.73,985 -296.75,1010.03 -296.75,1012.36 -300.02,1015.63 -300.02,1030.8 U2.15@-301.23,1032.01
CBUS0_3: D1.K U1.6 | length 196.9
  L1 w7: D1.K@783.93,1806.42 800,1790.35 v1(800,1770) ; v1(833.95,1665) 835.07,1665 844.22,1674.14 850.95,1674.14 858.22,1674.14 859.64,1672.72 U1.6@859.64,1671.03 859.64,1671.16 U1.6@858.22,1672.59
  L4 w7: v1@799.51,1769.51 799.51,1697.43 831.94,1665 v1(833.95,1665)
CLI_RX_1: SW6.2 TP6.1 U1.10 | length 753.8
  L1 w7: v1(780,1375) 780,1413.7 SW6.2@776.56,1417.14 777.66,1418.24 830.44,1418.24 834.54,1422.34 834.54,1423.14 849.89,1438.49 883.33,1438.49 901.31,1456.47 901.31,1496.15 911.37,1506.21 911.37,1547.56 U1.10@912.79,1548.98
  L4 w7: TP6.1@680,1805 680,1475 v1(780,1375)
CLI_TX_1: R22.1 SW6.5 TP7.1 U1.7 | length 3019.4
  L1 w7: SW6.5@682.07,1417.14 688.63,1423.69 719.97,1423.69 762.63,1466.35 790.5,1466.35 818.56,1494.41 818.56,1524.62 842.92,1548.98 U1.7@859.64,1548.98
  L1 w15: v1(80.16,1291.83) 80.16,1293.19 126.48,1339.5 592.62,1339.5 SW6.5@670.26,1417.14 ; R22.1@302.29,2139.84 303.36,2139.84 333.89,2109.3 333.89,2095.8 v1(334.85,2094.85) ; v1(618.01,1443.01) 619.37,1443.01 633.05,1429.32 658.94,1429.32 671.12,1417.14 SW6.5@682.07,1417.14
  L4 w15: TP7.1@-145,1305 -136.19,1296.19 -116.61,1296.19 -113.2,1292.79 79.21,1292.79 v1(80.16,1291.83) ; v1(334.85,2094.85) 214.55,2094.85 214.2,2094.5 96.22,2094.5 -82.78,1915.5 -231.5,1915.5 -259.5,1887.5 -259.5,1852.78 -242.22,1835.5 225.52,1835.5 v1(618.01,1443.01)
FLASH_MEM_C\S\: DN1.10 U3.37 | length 1774.4
  L1 w7: DN1.10@838.15,1124.7 840.56,1127.11 840.56,1139.89 854.74,1154.07 880.78,1154.07 v1(881.51,1154.8)
  L1 w12.33: U3.37@-157.14,1667.41 -156.58,1666.86 -115.03,1666.86 47.41,1504.42 47.41,1176.81 76.37,1147.85 142.69,1147.85 180.8,1109.73 180.8,976.37 v1(182.01,975.16)
  L4 w8: v1(182.01,975.16) 185.16,975.16 219.32,1009.32 692.66,1009.32 730.32,1046.98 730.32,1117.32 767.8,1154.8 v1(881.51,1154.8)
FLASH_MEM_CIPO: R24.1 U3.8 | length 2026.9
  L1 w7: U3.8@-684.7,1998.12 -682.82,2000 v1(-630,2000) ; v1(635.57,1166.5) 638.05,1168.99 638.05,1178.05 650,1190 R24.1@686.54,1190
  L4 w7: v1@-630.45,1999.55 -630,1999.11 -630,1865.38 -552.12,1787.5 -370.26,1787.5 -311.73,1728.97 -311.73,1566.73 -243.01,1498 375.64,1498 469.5,1404.14 469.5,1281.76 469.5,1197.65 492.18,1174.97 624.97,1174.97 633.43,1166.5 v1(635.57,1166.5)
FLASH_MEM_CLK: R19.1 U3.12 | length 1861.7
  L1 w7: U3.12@-684.7,1809.15 -674.42,1819.43 -661.77,1819.43 -660.48,1820.72 v1(-549.28,1820.72) ; v1(900,1310) 900,1310.94 927.54,1338.48 927.54,1340.96 R19.1@931.07,1340.96
  L4 w7: v1(-549.28,1820.72) -531.5,1838.5 -350.5,1838.5 -275,1763 202.57,1763 653.48,1312.09 897.91,1312.09 v1(900,1310)
FLASH_MEM_COPI: R20.1 U3.11 | length 2123.5
  L1 w7: U3.11@-684.7,1856.39 -529.39,1856.39 -497.49,1824.49 -497.49,1815.49 v1(-495,1813) ; R20.1@849,1254 854,1259 v1(882,1259)
  L4 w7: v1(-495,1813) -377.38,1813 -298.73,1734.36 -298.73,1572.11 -237.62,1511 -200.38,1511 6.62,1718 210.8,1718 672.78,1256.01 855,1256.01 857.99,1259 v1(882,1259)
GND: C1.1 C2.1 C3.1 C4.1 C5.1 C6.1 C7.1 C8.1 C9.1 C10.1 C11.1 C12.1 C13.1 C14.1 C15.1 C16.1 C17.2 C18.2 C20.2 C21.2 C22.2 C23.2 C24.2 C25.2 C26.1 C27.1 C29.1 C31.1 C32.1 C33.1 C34.1 C35.2 C36.1 C37.2 C38.1 D12.K D13.1 D14.K D15.K D16.K DN1.EP FL1.2 J1.6 J1.S1 J1.S2 J1.S3 J1.S4 J2.3 J2.5 J2.9 J5.2 J7.2 J14.3 J15.3 J16.7 J32.2 J33.A1/B12 J33.B1/A12 J33.S1 J33.S2 J33.S3 J33.S4 JP2.1 JP3.1 JP5.2 R2.1 R5.2 R6.1 R13.1 R14.2 R15.1 R26.2 R29.2 R30.1 R34.1 SW1.1 SW1.2 SW2.1 SW2.2 TP8.1 TP9.1 U1.5 U1.13 U2.4 U2.8 U2.14 U2.EP U3.1 U3.10 U3.17 U3.20 U3.32 U3.42 U3.51 U3.EP U4.5 U5.11 U5.12 U5.20 U5.EP U6.1 U6.6 U7.18 | length 9411
  L1 w7: v1(-370,1150) -369.04,1149.04 -346.55,1149.04 -345.5,1148 U2.8@-340.6,1148 ; U2.14@-320.91,1032.01 U2.EP@-320.91,1080.16 ; v2(-290.23,1110.84) -282.59,1118.48 -273.14,1118.48 -272.09,1119.53 U2.4@-256.62,1119.53 ; v1(-257.43,1139.26) -257.43,1120.34 U2.4@-256.62,1119.53 ; U2.4@-253.07,1119.53 U2.4@-256.62,1119.53 ; v1(-130,310) -103.12,310 -102.86,310.26 -88.33,310.26 -87.72,310.87 U6.1@-87.72,325.4 ; U6.1@-88.05,325.73 -88.05,362.2 -75.91,374.34 U6.6@-75.91,388.39 ; 877.36,1636.58 U1.5@877.36,1671.03
  L1 w15: v1(-1135,1460) -1135,1369.88 J1.S3@-1124.17,1359.05 -1096.48,1386.75 -1096.48,1451.42 -1019.89,1528.01 -928.01,1528.01 TP9.1@-880,1480 ; J1.S4@-1124.17,740.94 -1060.12,805 v1(-1015,805) ; J2.3@-1012.26,1820.09 J2.5@-1012.26,1770.09 J2.9@-1012.26,1670.09 -930,1587.83 -930,1530 ; J32.2@-938.58,2204.67 -938.29,2204.37 -825.16,2204.37 R14.2@-766.07,2263.47 -770.82,2268.22 -770.82,2295.82 v1(-785,2310) ; v1(-793.88,802.32) -792.93,801.37 -791.37,801.37 -748.66,758.66 J1.S2@-746.22,758.66 ; v1(-770,1275) -756.78,1288.22 -756.78,1358.33 J1.S1@-746.22,1368.9 -746.22,1417.87 -765,1436.65 v1(-765,1438) ; J1.S1@-722.82,1392.3 -722.82,1446.44 ; v1(-705,410) -705,481.55 C35.2@-701.54,485 ; J1.6@-704.88,1177.95 -698.6,1171.67 -655.54,1171.67 -643.87,1160 v1(-642.51,1160) ; U3.20@-690.98,1437.47 -709.43,1437.47 -709.61,1437.65 -714.03,1437.65 -722.82,1446.44 ; U3.17@-684.7,1572.93 -690.98,1566.65 -701.64,1566.65 -722.82,1545.47 -722.82,1446.44 ; U3.10@-684.7,1903.63 -674.86,1903.63 -668.58,1909.91 -668.58,1913.81 -659.79,1922.6 -593.12,1922.6 -497.59,2018.13 -487.86,2027.86 U3.EP@-465.72,2050 ; U3.1@-684.7,2328.83 -682.46,2326.59 -647.72,2326.59 -517.89,2196.77 -497.59,2196.77 -485.4,2184.58 U3.EP@-485.4,2164.28 ; v1(-624.6,1314.83) -624.38,1314.83 -613.31,1303.75 JP5.2@-591.07,1303.75 ; JP2.1@-593.09,878.86 -581.92,867.69 v1(-581.92,834.5) ; C36.1@-582.17,280 -525.96,336.22 -525.96,349.04 v1(-525,350) ; v1@-545,1100 v1(-543.13,1100) -542.18,1099.04 -542.18,1068.71 C9.1@-491.07,1017.6 -499.53,1009.14 C8.1@-499.53,935 ; R2.1@-499.53,865 -498.26,865 -476,887.27 v1(-476,888) ; v1(-485.4,2148.7) U3.EP@-485.4,2164.28 ; v1(-485.4,2188.07) U3.EP@-485.4,2164.28 ; v1(-376.71,1301.83) -375.76,1300.87 -347.13,1300.87 C14.1@-342.63,1296.37 ; v1(-370,2190) -349.56,2189.57 -330.02,2189.16 -329.59,2189.57 -318.45,2200.25 -184.37,2328.83 -77.04,2328.83 -64.65,2316.45 D12.K@-64.65,2310 ; U3.EP@-350,2050.08 -326.35,2026.44 -326.35,1947.35 -282.63,1903.63 U3.42@-157.14,1903.63 ; v1(-329.5,954.25) -329.12,954.63 -289.91,954.63 R5.2@-289.53,955 ; U2.EP@-320.91,1080.16 v2(-311.07,1090) ; v1(-236.57,1213) -235.61,1213.96 -223.25,1213.96 -211.07,1226.14 C15.1@-211.07,1226.54 ; v1(-215,1435) -213.65,1435 -212.24,1433.6 -160.44,1433.6 U3.32@-157.59,1430.75 ; C33.1@-168.67,500 -158.46,489.79 -158.46,457.46 v1(-157.5,456.5) ; v1(-124.31,986.79) -122.96,986.79 -106.73,970.56 -106.38,970.56 -90.82,955 R6.1@-87.6,955 ; v1(-100,2115) -82.51,2132.49 -82.51,2139.04 -70.12,2151.42 D16.K@-61.07,2151.42 ; C7.1@-71.07,1132.41 -64.32,1125.65 -31.77,1125.65 v1(-30.82,1124.7) ; C16.1@-50,536.54 -50,496.34 C27.1@-8.67,455 20,426.34 v1(20,390) ; C31.1@-3.67,250 -3.67,246.07 22.71,219.69 22.71,214.87 v1(25.83,211.75) ; v1(14.5,2113.38) 14.5,2114.73 22.49,2122.72 22.49,2144.04 34.88,2156.42 D15.K@43.93,2156.42 ; C26.1@81.51,160.67 93.7,172.85 93.7,176.9 143.93,227.13 C21.2@143.93,235 120.96,257.98 120.96,279.04 v1(120,280) ; C20.2@84,539.39 92.25,531.15 103.5,531.15 110.65,524 v1(112,524) ; C32.1@118.46,1115 122.93,1110.53 122.93,1054.47 C29.1@127.4,1050 128.22,1050 140.4,1037.82 140.4,1002.32 v1(141.36,1001.36) ; D14.K@145.35,2080 157.73,2092.39 157.73,2103.73 177.44,2123.44 245.49,2123.44 293.3,2075.63 293.3,2072.15 305.45,2060 R34.1@305.91,2060 ; C22.2@221.71,633.61 C22.2@225.31,630 ; C22.2@224.56,630.76 232.57,622.74 232.57,601.78 236,598.35 v1(236,597) ; R30.1@228.31,155.14 239.18,144.27 239.18,117.14 TP8.1@279.78,76.54 ; v1(250,910) 251.35,910 264.46,896.89 275.11,896.89 D13.1@307,865 ; v1(276.98,2025.32) 305.91,2054.25 R34.1@305.91,2060 ; TP8.1@279.78,86.78 311,118 311,138 ; R34.1@305.91,2060.32 R34.1@305.91,2060 ; R34.1@308.93,2060 R34.1@305.91,2060 ; C24.2@348.93,459.53 357.46,468.06 394.02,468.06 v1(394.98,469.02) ; C25.2@348.93,525 352.46,528.54 392.56,528.54 v1(393.52,529.49) ; v1(405,1170.16) 406.06,1170.16 437.2,1201.3 U7.18@437.2,1220 ; R29.2@408.38,735 408.38,729.1 423.52,713.96 441.01,713.96 443.3,711.67 472.23,711.67 478.65,718.09 v1(480,718.09) ; J16.7@468.93,60 478.5,69.57 478.5,89.6 562.66,173.76 ; R26.2@471.59,663.39 494.27,663.39 v1(517.66,640) ; v1(525,2200) 525.11,2199.89 C13.1@583.93,2199.89 592.12,2208.08 J33.S4@683.34,2208.08 ; v1(563.97,513.97) 563.01,513.01 563.01,492.38 SW2.2@558.31,487.68 SW2.1@721.69,487.68 ; C12.1@575.47,625 610,590.47 v1(610,590) ; v1@594.43,145.06 565.73,173.76 562.66,173.76 ; C38.1@668.9,280 562.66,173.76 ; J33.S4@707.75,2226.12 J33.S2@707.75,2077.76 733.37,2052.14 733.37,2025.05 755.54,2002.88 755.54,2002.1 767.37,1990.27 R13.1@768.15,1990.27 R13.1@768.93,1990.27 ; v1(755,1595) 754.04,1595.96 754.04,1605.96 732.02,1627.98 732.02,1653.52 C4.1@722,1663.54 722,1662.2 723.98,1660.22 732.02,1660.22 734.16,1662.36 793.17,1662.36 C2.1@794,1661.54 794,1659.57 823.02,1630.55 ; R13.1@780.76,2002.1 780.76,2002.88 782.95,2005.07 J33.B1/A12@782.95,2055.12 ; 823.02,1630.5 841.01,1630.5 870.29,1601.22 895.14,1601.22 U1.13@903.93,1610 877.36,1636.58 ; v3@895.33,1094.54 896.29,1095.49 940.44,1095.49 952.94,1107.99 SW1.1@968.16,1107.99 ; v1(900,270) 900,343.95 931.04,374.99 931.81,374.99 1040.19,483.38 1040.19,544.37 1009.94,574.62 C37.2@1007.98,574.62 ; C1.1@925.84,1181.96 929.16,1178.64 932.04,1178.64 965.14,1145.54 SW1.1@965.14,1118.28 ; FL1.2@930,1971.42 930.37,1971.04 930.37,1948.74 942.86,1936.25 968.32,1936.25 989.04,1956.97 989.04,1959.04 v1(990,1960) ; C6.1@933.47,1475 v1(970,1475) ; v1(939,868) 939.96,868.96 954.39,868.96 980,894.57 C34.1@980,896.53 ; SW1.1@986.32,1107.69 1015.92,1078.09 1029.04,1078.09 v1(1030,1077.13) ; C10.1@1014.88,790 1038.65,766.24 1038.65,739.37 1051.66,726.35 v1(1051.66,725) ; J33.A1/B12@1038.93,2060 1043.81,2055.12 1065.64,2055.12 ; v1(1069.8,2024.8) 1068.85,2025.76 1068.85,2051.92 1065.64,2055.12 ; v1(1074,929) 1071.09,929 1070.69,928.6 C11.1@1070.69,951.82 ; v1(1076.23,1112.56) 1076.44,1112.77 1136.32,1112.77 SW1.2@1136.54,1112.99 ; C5.1@1077.46,1740 1079.43,1740 1091.62,1727.81 C5.1@1091.62,1725.85 ; v1(1078,1706) 1079.35,1706 1093.55,1720.19 ; J33.S1@1087.48,2055.12 1065.64,2055.12 ; 1094.74,1717.66 1109.15,1703.25 1109.15,1671.76 1109.15,1667.83 C3.1@1101.33,1660 ; J7.2@1110,320 1110,226.35 1120,216.35 v1(1120,215) ; J33.S3@1110.11,2232.48 J33.S1@1110.11,2077.76 1112.61,2075.26 R15.1@1112.61,1956.65 ; C11.1@1070.69,951.82 1068.72,951.82 C11.1@1056.54,964 1058.5,964 C11.1@1070.69,951.82
  L4 w7: v1@-257.39,1139.26 -229.73,1111.6 -220.57,1111.6 JP3.1@-211.07,1102.1 ; JP3.1@-210.32,1101.35 -210.32,1105.51 -192.23,1123.6 -187.55,1123.6 -170.53,1140.61 v1(-170.53,1172.47)
  L4 w15: J15.3@-1117.03,75 -1116.87,75.17 -1116.87,135 ; J14.3@-1117.03,201.11 -1117.03,295.51 -1101.07,311.47 J5.2@-1101.07,325 -1087.54,325 -1072.54,340 v1@-1046.35,340 ; J14.3@-1116.87,200.95 -1116.87,135 ; v1(-1070,135) -1116.87,135 ; v1(112,524) 112.48,523.52 127.48,523.52 145.33,505.67 v2(183.42,505.67) ; v2(213.93,434.81) v2(213.93,464.33) ; v2(214.49,532.48) 214.21,532.2 214.21,505.95 v2(213.93,505.67) ; v2(244.44,464.33) v2(213.93,464.33) ; v4(244.44,505.67) v2(213.93,505.67) ; v2(183.42,505.67) v2(213.93,505.67) ; v2(183.42,505.67) v2(183.42,464.33) v2(213.93,464.33)
  other v1: 594.43,145 295,205 230,330 -1045,340 -118.69,552.31 190.56,634.56 179,660 211,661 -522.7,1553.8 -483.33,1553.8 -407.6,1553.8 -368.23,1553.8 -522.7,1593.17 -483.33,1593.17 -407.6,1593.17 -368.23,1593.17 -522.7,1666.2 -483.33,1666.2 -407.6,1666.2 -368.23,1666.2 -522.7,1705.57 -483.33,1705.57 -407.6,1705.57 -368.23,1705.57 -485,2025 -445,2025 -371.37,2025.16 -327.63,2025.16 -485,2075 -445,2075 -328.03,2074.63 -372.59,2075.86 -370,2145 -330,2145 -446.03,2148.7 -446.03,2188.07 -330,2190
  other v2: -331.9,1069.17 -290.23,1069.17 -331.9,1110.84
  other v3: 683.94,1094.78 893.94,1094.78
GPIO_A25_9: J13.1 R36.1 U7.6 | length 2910.6
  L1 w7: R36.1@146.53,1990 213.16,1923.38 213.16,1879.24 U7.6@222.4,1870 222.4,1657.62 227,1653.02 v1(227,1649.5)
  L4 w7: v1(227,1649.5) 225.5,1648 -13.06,1648 -90.5,1570.56 -90.5,1548.5 -85,1543 349.03,1543 482.5,1409.53 482.5,1203.1 487.1,1198.5 909.5,1198.5 1056,1345 1070.87,1345 1088.23,1327.64 1088.23,1287.84 929.69,1129.3 773.69,1129.3 748.71,1105.44 748.59,1105.32 743.82,1100.55 743.82,1041.39 694.25,991.82 674,991.82 J13.1@645,962.82
GPIO_A26_9: J13.2 R35.1 U7.13 | length 869.5
  L1 w7: U7.13@82.87,1220 99.48,1236.61 99.48,1265.77 103.58,1269.87 178.75,1269.87 193.43,1255.2 193.43,1137.45 215.88,1115 221.92,1115 221.92,1111.62 247.47,1086.07 247.47,1034.79 397.87,884.39 560.97,884.39 573.97,871.39 636.43,871.39 J13.2@645,862.82
GPIO_A27_9: J12.1 U7.16 | length 1352.7
  L1 w7: v1(262.5,1272) 262.5,1271.67 295.47,1238.71 U7.16@295.47,1220 ; v1(490,1077.19) 490,988.07 J12.1@517.5,960.58
  L4 w7: v1(262.5,1272) 262.5,1215.36 215,1167.86 215,1154 235,1134 259,1134 283.5,1158.5 283.5,1175.12 301,1192.62 301,1401 343,1443 382,1443 443.5,1381.5 443.5,1186.88 485.87,1144.51 575.61,1142.02 590.55,1127.08 590.55,1105.43 562.3,1077.19 v1(490,1077.19)
GPIO_B8_9: J12.2 U7.15 | length 1416.4
  L1 w7: U7.15@224.6,1220 241.77,1202.84 241.77,1169.68 248.44,1163.02 v1(248.44,1159.5) ; v1(345,1067.5) 345,1033.07 J12.2@417.5,960.58
  L4 w7: v1(248.44,1159.5) 249.5,1159.5 288,1198 288,1421 341,1474 381.26,1474 456.5,1398.76 456.5,1192.27 488.32,1160.45 572.28,1160.45 581,1155.02 603.55,1132.47 603.55,1076.55 578.69,1051.69 360.81,1051.69 v1(345,1067.5)
M\C\U\_\R\E\S\E\T\_5: C11.2 J2.10 R8.2 R10.1 U3.24 | length 4196.3
  L1 w7: J2.10@-859.13,1663.23 -859.13,1649.13 v1(-830.87,1620.87) ; J2.10@-849.91,1667.73 -813.4,1667.73 -786.87,1694.26 v1(-786,1694.26) ; v1(-525.88,1434.42) -525.88,1430.91 -515.56,1420.58 U3.24@-515.56,1374.45 ; v1(565.05,1116.52) 565.05,1114.62 575.65,1104.02 634.6,1104.02 657.86,1080.77 657.86,1077.9 658.31,1077.45 658.31,1060.08 696.38,1022 731.91,1022 799.77,954.14 835.43,954.14 836.04,954.25 841.1,955.14 841.92,955.77 844.84,957.08 846.6,958.84 861.77,974.01 881.3,974.01 883.03,973.92 885.23,973.81 885.43,973.81 903.5,973.81 929.23,999.54 929.23,1000.18 931.99,1002.94 931.99,1036.3 947.32,1051.63 950.04,1051.63 996.3,1051.63 1047.7,1051.63 1055.5,1059.44 1055.5,1082.47 1062.87,1089.84 ; v1(1073.93,1060) 1073.93,1078.78 1062.87,1089.84 ; v1(1090,997) 1090,996.25 1122.25,964 C11.2@1123.47,964 ; R8.2@1123.47,890 C11.2@1123.47,970 ; R10.1@1136.2,1189.63 1143.47,1182.37 1143.47,1160.53 1123.43,1140.5 1068.11,1140.5 1050.73,1123.12 1050.73,1101.99 1062.87,1089.84
  L4 w7: v1(-830.87,1620.87) -808.74,1643 -653.19,1643 -614.78,1604.59 -614.78,1544.14 -525.88,1455.24 v1(-525.88,1434.42) ; v1(-786,1694.26) -786,1935 -771,1950 -733,1950 -557.5,1774.5 -375.65,1774.5 -324.73,1723.59 -324.73,1501.73 -188,1365 79,1365 177,1267 177,1151.62 207.62,1121 273,1121 296.5,1144.5 296.5,1155.95 319.05,1178.5 330.5,1178.5 375,1223 375,1325 391,1341 417,1341 430.5,1327.5 430.5,1178.5 494.05,1114.95 540.9,1114.95 v1(565.05,1116.52) ; v1(1073.93,1060) 1073.93,1057.5 1089.67,1041.77 1089.67,997.33 v1(1090,997)
MCU_RX_1: SW6.4 U3.44 | length 1486.3
  L1 w15: v1(-240,2000) -182.64,2000 -180.76,1998.12 U3.44@-157.14,1998.12 ; v1(665,1356.5) 665,1330.9 677.19,1318.71 SW6.4@682.07,1318.71
  L4 w15: v1(-240,2000) -301.5,1938.5 -301.5,1835.38 -253.12,1787 202.61,1787 632.5,1357.11 664.39,1357.11 v1(665,1356.5)
MCU_TX_1: SW6.1 U3.43 | length 1507.5
  L1 w15: v1(-245,1950) -240,1950 -239.56,1950.44 U3.43@-145.44,1950.44 ; U3.43@-157.14,1950.88 -145.88,1950.88 U3.43@-145.44,1950.44 ; U3.43@-145,1950 U3.43@-145.44,1950.44 ; v1(725,1360) 766.29,1318.71 SW6.1@776.56,1318.71
  L4 w15: v1(-245,1950) -280.5,1914.5 -280.5,1844.08 -250.92,1814.5 204.81,1814.5 633.31,1386 699,1386 v1(725,1360)
MEM_SPI_CIPO: DN1.15 R24.2 | length 71
  L1 w7: DN1.15@739.72,1124.7 740.79,1125.77 740.79,1177.32 R24.2@753.47,1190
MEM_SPI_CLK: DN1.14 R19.2 | length 259.6
  L1 w7: DN1.14@759.41,1124.7 760.47,1125.77 760.47,1146.87 794.87,1181.27 794.87,1253.47 856.46,1315.06 856.46,1333.28 R19.2@864.14,1340.96
MEM_SPI_COPI: DN1.11 R20.2 | length 75.9
  L1 w7: DN1.11@818.46,1124.7 818.46,1158 825.17,1164.71 826.26,1164.71 848.62,1187.07 R20.2@849,1187.07
MIC+_9: C28.1 U7.3 | length 119.4
  L1 w12: U7.3@435,1870 435,1888.71 453.93,1907.64 C28.1@453.93,1981.54
MIC-_9: J11.2 U7.2 | length 724.7
  L1 w7: J11.2@244.08,2285.38 250.7,2292 319,2292 407.67,2203.33 407.67,1952.12 400.59,1945.04 400.59,1825.99 408.95,1817.63 471.88,1817.63 488.38,1834.13 488.69,1834.13 505.86,1851.3 U7.2@505.86,1870
NetC19_1: C19.1 L2.2 R25.1 U5.4 U5.5 U5.6 U5.7 | length 406.4
  L1 w7: R25.1@28.93,535.63 78.93,485.63 L2.2@78.93,470.44 84.43,464.94 84.43,448.29 100.79,431.93 113.66,419.06 113.66,402.81 120.5,395.97 120.5,326.1 116.4,322 86.23,322 C19.1@83.22,325 C19.1@83.22,326.93 ; L2.2@95,470 107.69,482.69 146.46,482.69 148.97,485.2 U5.5@148.97,494.85 U5.4@148.97,514.53 ; U5.7@148.97,455.48 U5.6@148.97,475.16 148.97,482.69
NetC19_2: C19.2 U5.8 | length 142.4
  L1 w7: U5.8@148.97,435.79 137.16,435.79 126.66,425.29 126.66,408.2 133.5,401.36 133.5,379.18 163.93,348.75 C19.2@163.93,325
NetC20_1: C20.1 U5.1 | length 137.2
  L1 w7: C20.1@84,588.61 85.97,588.61 102.86,605.5 106.44,605.5 112.44,611.5 159.56,611.5 183.18,587.88 183.18,577.96 184.4,576.74 U5.1@184.4,569.65
NetC21_1: C21.1 U5.10 | length 173.1
  L1 w7: U5.10@184.4,400.36 185.5,399.26 185.5,360.85 193.25,353.1 193.25,244.74 C21.1@202.99,235
NetC22_1: C22.1 R28.1 U5.18 | length 237
  L1 w7: v1(270,587) 270,590.52 274.5,595.02 274.5,628.06 264.5,638.06 264.5,715.97 R28.1@273.54,725 ; U5.18@278.89,534.22 279.45,534.77 v1(302.3,534.77)
  L4 w7: v1(270,587) 270,583.48 274.73,578.75 274.73,576.74 302,549.47 302,535.07 v1(302.3,534.77)
NetC23_1: C23.1 R28.2 | length 85.6
  L1 w7: C23.1@143.93,712.52 211.84,712.52 R28.2@224.33,725
NetC28_2: C28.2 J11.1 R33.2 | length 717.6
  L1 w7: J11.1@119.94,2309.52 J11.1@149.69,2279.78 ; R33.2@207.4,2180 207.4,2222.07 161.76,2267.7 J11.1@149.69,2279.78 ; C28.2@453.93,2048.47 465.2,2059.73 465.2,2199.56 327.76,2337 216.81,2337 182.98,2303.17 173.08,2303.17 J11.1@149.69,2279.78
NetC30_1: C30.1 R34.2 | length 82.8
  L1 w7: C30.1@372.84,1980 375.86,1983.02 375.86,2057.31 R34.2@372.84,2060.32